# Altium PCB Arduino_to_G2LaunchPad.PcbDoc
Units mil, origin at the board's own origin, x right, y up, seen from the top; angles counter-clockwise.
Board outline 2000 x 1750 mil, 2 copper layers (Top Layer, Bottom Layer); 4 components, 27 nets, 70 pads, 0 vias.
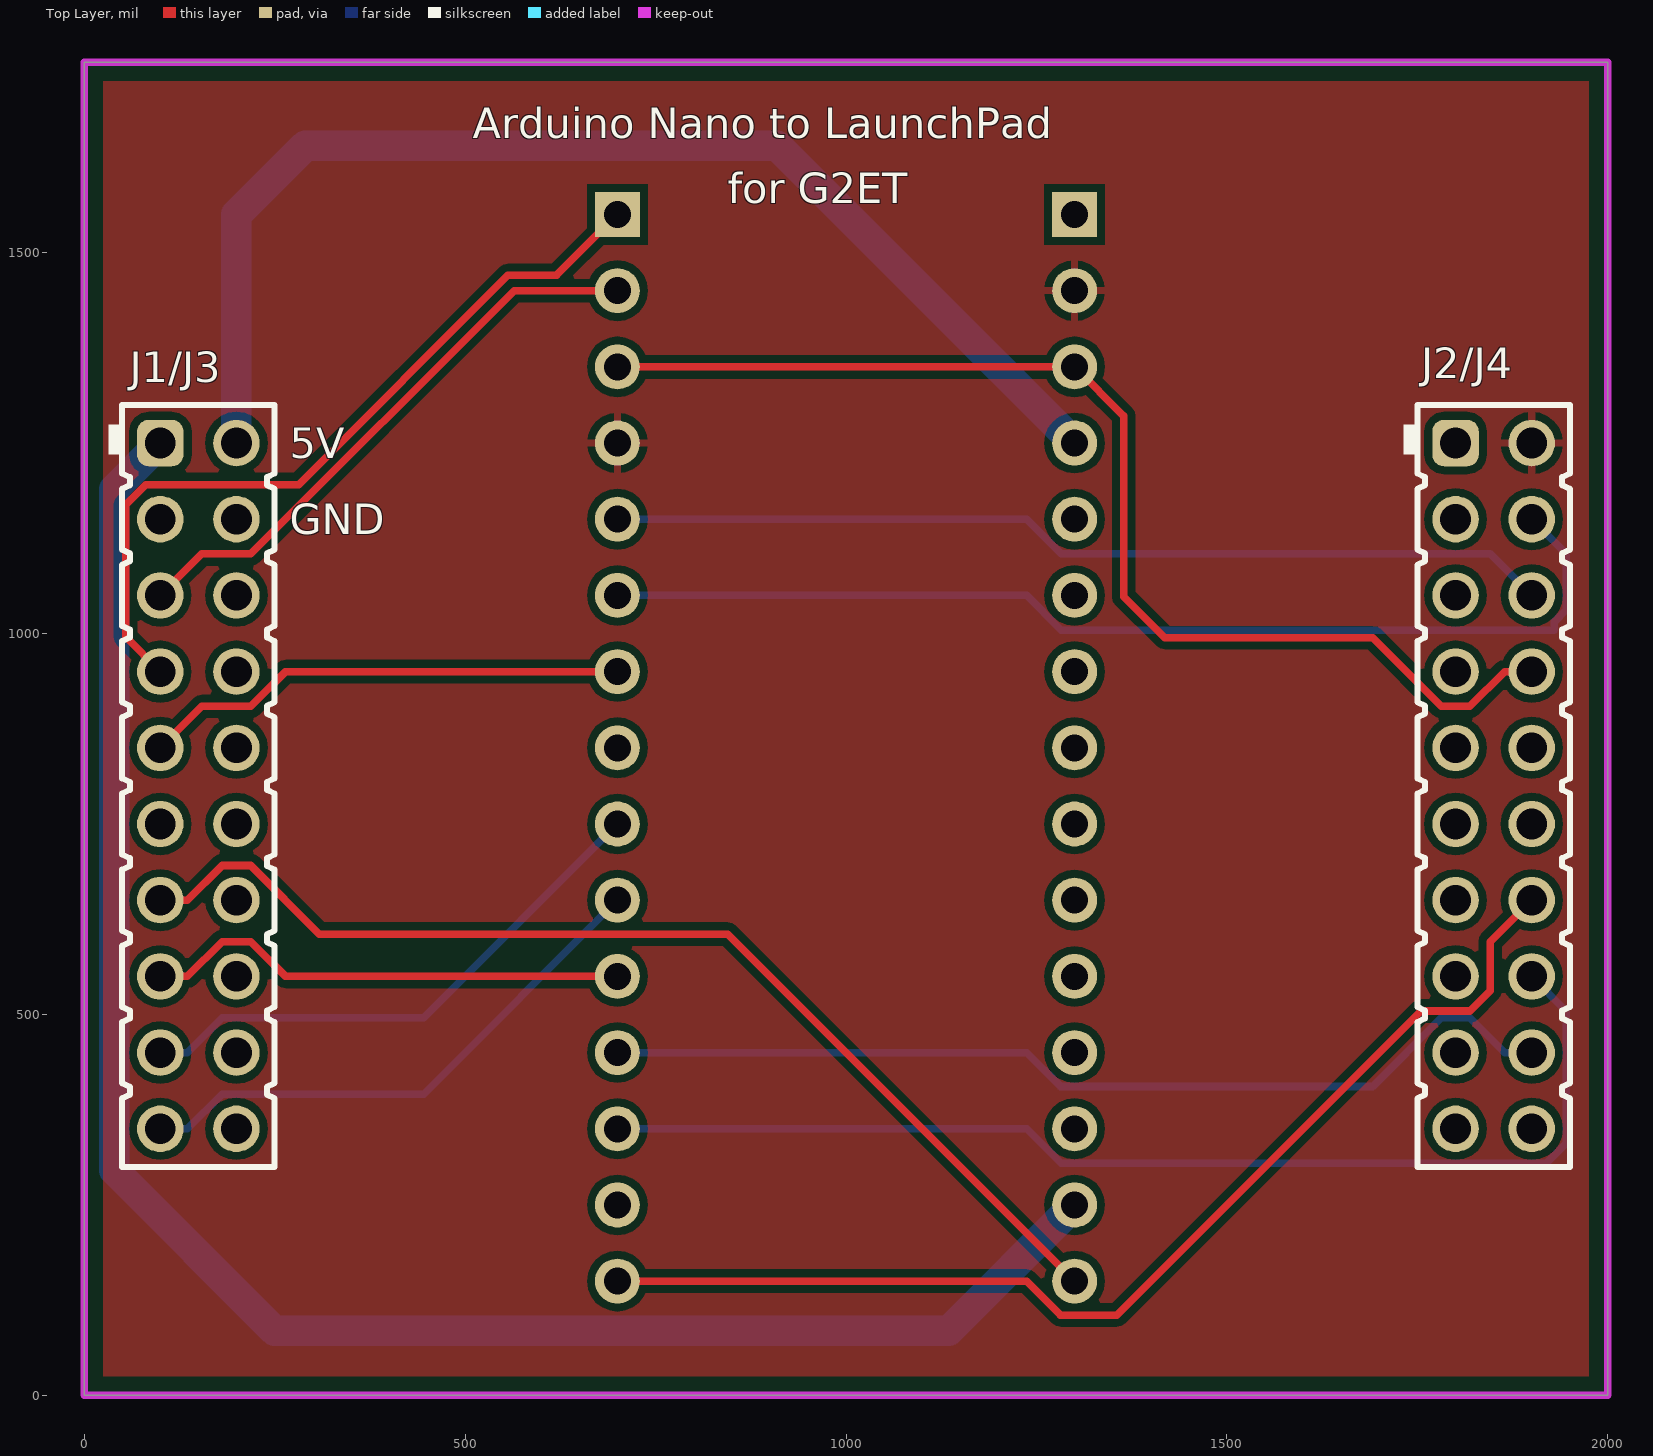
[diagram p0: Top Layer view]
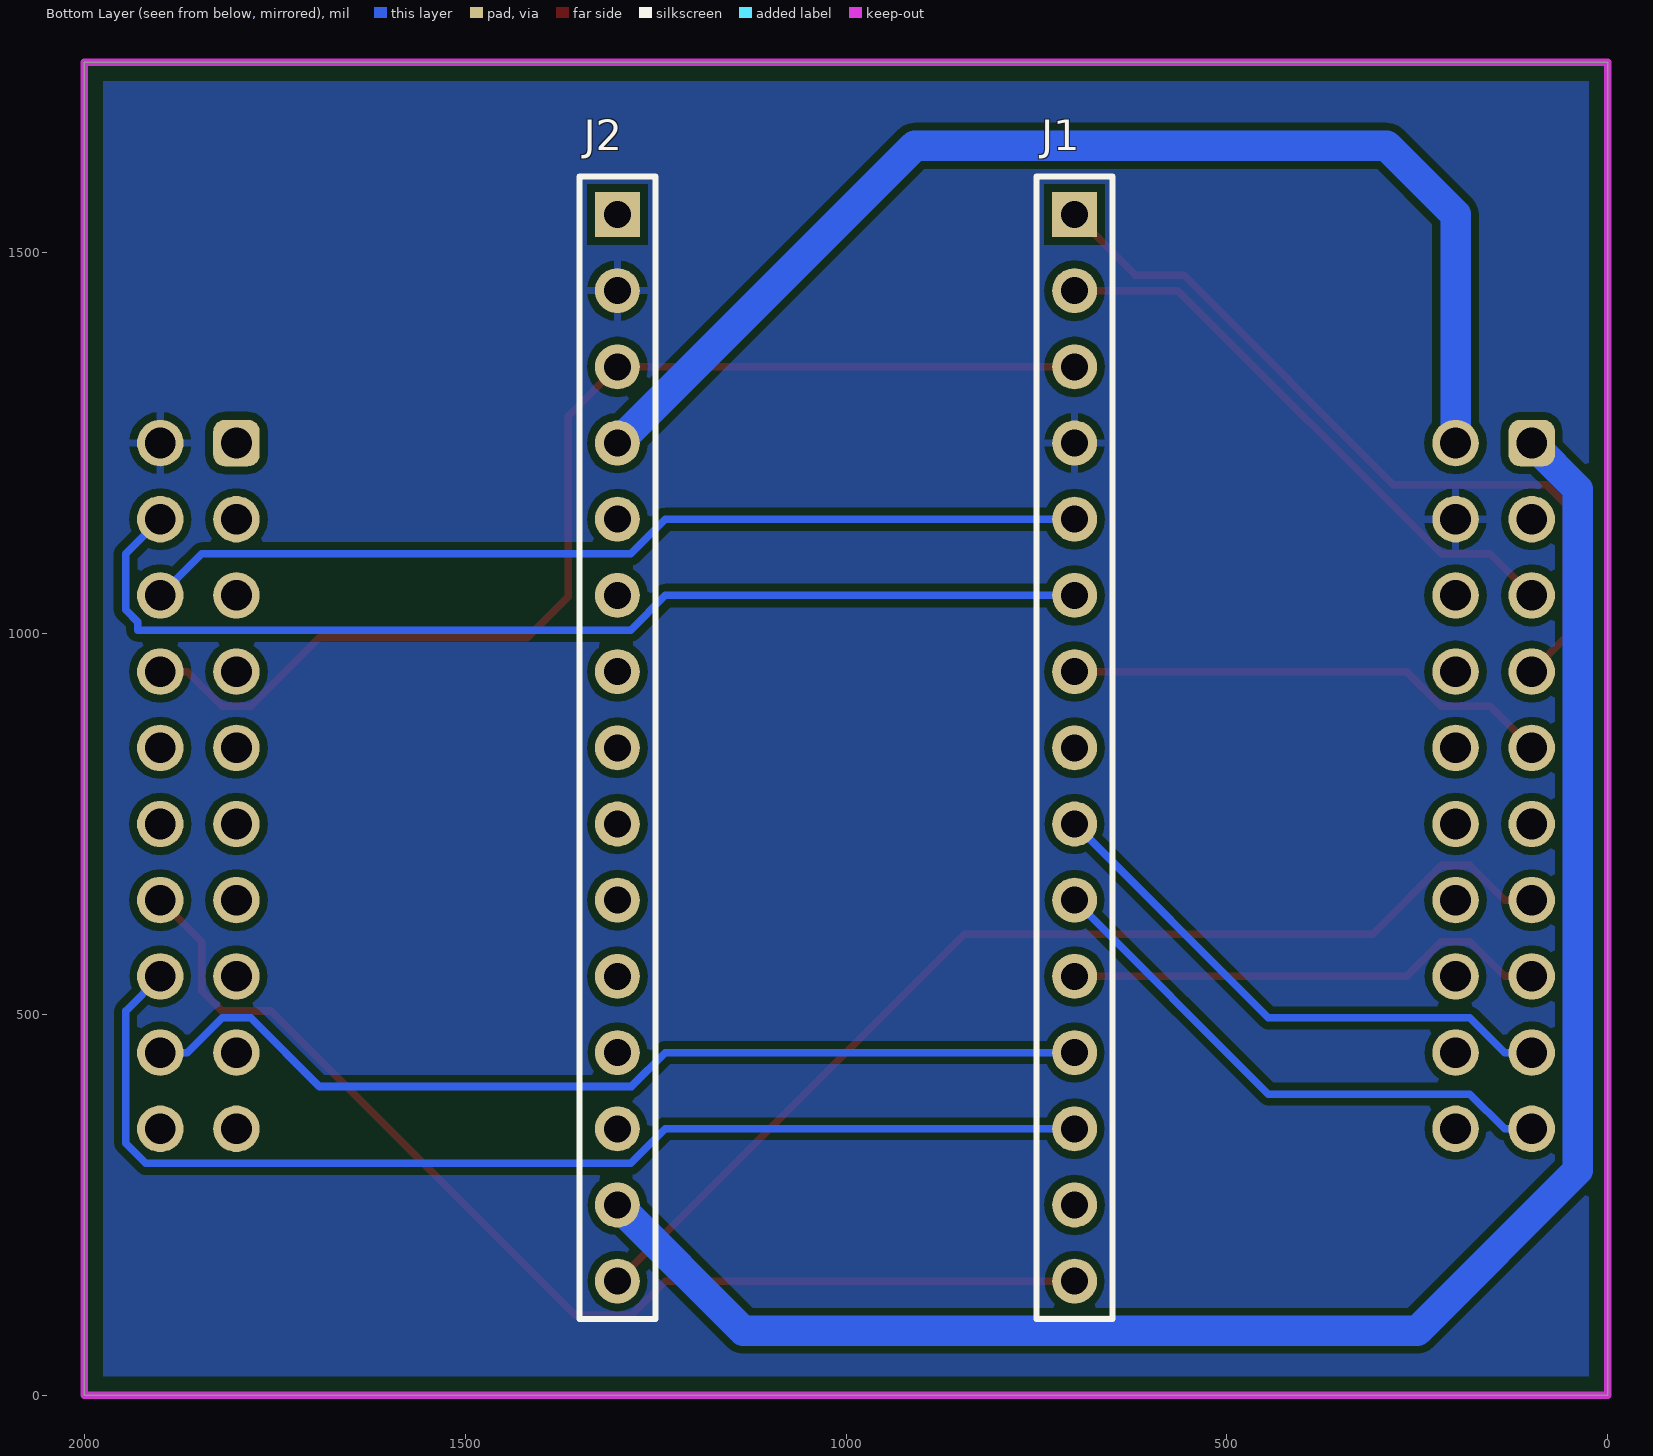
[diagram p1: Bottom Layer view, seen from below]

## Layer stack, top to bottom
Top Solder: solder mask 0.4, Solder Resist, Dk 3.5
Top Layer: signal copper 1.4
Dielectric 1: dielectric 12.6, FR-4, Dk 4.8
Bottom Layer: signal copper 1.4
Bottom Solder: solder mask 0.4, Solder Resist, Dk 3.5

## Board outline
0,0 0,1750 2000,1750 2000,0

## Design rules (kind name [scope] priority, off if disabled: settings)
Clearance [All] p1: gap=10
HoleSize [All] p1: absolutevalues=TRUE maxlimit=100 minlimit=10 maxpercent=80.000 minpercent=20.000
PolygonConnect [All] p1: connectstyle=Relief reliefconductorwidth=10 reliefentries=4 polygonreliefangle="90 Angle" airgapwidth=10
RoutingVias [All] p1: holewidth=28 width=50 viastyle="Through Hole" minholewidth=28 minwidth=50 maxholewidth=28 maxwidth=50
SolderMaskExpansion [All] p1: expansion=4
Width [All] p1: maxlimit=40 minlimit=10 preferedwidth=10 minimp=50.000000 maximp=50.000000 favimp=50.000000
29 further rules are at their usual default settings.

## Components (designator, comment, footprint, x,y, rotation, side; value= is the part's Value field where it differs from the comment)
J1 "Header 15" HDR1X15 700,1550 r270 bottom
J1/J3 "TSW-110-22-G-D" Samtec_TSW-110-22-x-D 150.01,800 r0 top
J2 "Header 15" HDR1X15 1300,1550 r270 bottom
J2/J4 "TSW-110-22-G-D" Samtec_TSW-110-22-x-D 1850.01,800 r0 top

## Footprints (in the part's own frame and the unit in brackets; to place one, negate y for a bottom-side part, rotate by r counter-clockwise, add the part's x,y. Pads: shape width x height; smd on the part's side, far side on the other; paste and mask are expansions set on the pad)
HDR1X15 [mm] "Connector; Header; 15 Position"
  rect 1.5x1.5 hole 0.9: 1(0,0)
  round 1.5 hole 0.9: 2(2.54,0) 3(5.08,0) 4(7.62,0) 5(10.16,0) 6(12.7,0) 7(15.24,0) 8(17.78,0) 9(20.32,0) 10(22.86,0) 11(25.4,0) 12(27.94,0) 13(30.48,0) 14(33.02,0) 15(35.56,0)
  silkscreen extent -1.27,-1.27 36.83,1.27
Samtec_TSW-110-22-x-D [mm] "Header, 2.54mm, 10x2, TH"
  rrect50% 1.55x1.55 hole 1.02: 1(-1.27,11.43)
  round 1.55 hole 1.02: 2(1.27,11.43) 3(-1.27,8.89) 4(1.27,8.89) 5(-1.27,6.35) 6(1.27,6.35) 7(-1.27,3.81) 8(1.27,3.81) 9(-1.27,1.27) 10(1.27,1.27) 11(-1.27,-1.27) 12(1.27,-1.27) 13(-1.27,-3.81) 14(1.27,-3.81) 15(-1.27,-6.35) 16(1.27,-6.35) 17(-1.27,-8.89) 18(1.27,-8.89) 19(-1.27,-11.43) 20(1.27,-11.43)
  silkscreen extent -3,-12.7 2.54,12.7, body extent -2.54,-12.7 2.54,12.7, height 8.38

## Part data
J1 J2: "Header, 15-Pin"
J1/J3 J2/J4: "Header, 2.54mm, 10x2, Gold, TH"

## Nets (pads, with @x,y where several pads share a name; then routed paths per layer and width w, separated by ;. In a path a pad name is that pad's centre, name@x,y a point inside that pad or via, vN(x,y) a via of type N, cw(c..) or ccw(c..) an arc to the next point about the centre after c; other vN are vias at no path point)
3V3: J1/J3.1 J2.14 | length 2395.6
  Bottom Layer w40: J1/J3.1 39.49,1189.49 39.49,295.51 250,85 1135,85 J2.14
5V: J1/J3.2 J2.4 | length 1598.8
  Bottom Layer w40: J1/J3.2 200,1550 290,1640 910,1640 J2.4
A0: J2.12
A1: J2.11
A2: J2.10
A3: J2.9
A4: J2.8
A5: J2.7
A6: J2.6
A7: J2.5
AREF: J2.13
D0/RX: J1.2 J1/J3.5 | length 765.7
  Top Layer w10: J1/J3.5 154.49,1104.49 218.85,1104.49 564.36,1450 J1.2
D1/TX: J1.1 J1/J3.7 | length 1041.1
  Top Layer w10: J1/J3.7 54.49,995.51 54.49,1168.85 81.15,1195.51 281.59,1195.51 556.08,1470 620,1470 J1.1
D2: J1.5 J2/J4.6 | length 1241.4
  Bottom Layer w10: J1.5 1237.03,1150 1282.54,1104.49 1845.51,1104.49 J2/J4.6
D3: J1.6 J2/J4.4 | length 1419.3
  Bottom Layer w10: J1.6 1237.03,1050 1282.54,1004.49 1929.49,1004.49 1929.49,1015.12 1945.51,1031.15 1945.51,1104.49 J2/J4.4
D4: J1.7 J1/J3.9 | length 641.4
  Top Layer w10: J1/J3.9 154.49,904.49 218.85,904.49 264.36,950 J1.7
D5: J1.8
D6: J1.9 J1/J3.17 | length 724.3
  Bottom Layer w10: J1/J3.17 135.64,450 181.15,495.51 445.51,495.51 J1.9
D7: J1.10 J1/J3.19 | length 724.3
  Bottom Layer w10: J1/J3.19 135.64,350 181.15,395.51 445.51,395.51 J1.10
D8: J1.11 J1/J3.15 | length 637.7
  Top Layer w10: J1/J3.15 135.64,550 181.15,595.51 218.85,595.51 264.36,550 J1.11
D9: J1.12 J2/J4.18 | length 1274.6
  Bottom Layer w10: J1.12 1237.03,450 1281.56,405.47 1691.11,405.47 1781.15,495.51 1818.85,495.51 1864.36,450 J2/J4.18
D10: J1.13 J2/J4.16 | length 1513.1
  Bottom Layer w10: J1.13 1237.03,350 1282.54,304.49 1918.85,304.49 1945.51,331.15 1945.51,504.49 J2/J4.16
D11/MOSI: J1.14
D12/MISO: J1.15 J2/J4.14 | length 1481.7
  Top Layer w10: J1.15 1237.03,150 1281.56,105.47 1355.47,105.47 1754.49,504.49 1818.85,504.49 1845.51,531.15 1845.51,595.51 J2/J4.14
D13/SCK: J1/J3.13 J2.15 | length 1444.8
  Top Layer w10: J1/J3.13 135.64,650 181.15,695.51 218.85,695.51 308.89,605.47 844.53,605.47 J2.15
GND: J1.4 J1/J3.4 J2.2 J2/J4.2
RESET: J1.3 J2.3 J2/J4.8 | length 1542.2
  Top Layer w10: J1.3 J2.3 1364.53,1285.47 1364.53,1048.44 1418.44,994.53 1691.11,994.53 1781.15,904.49 1818.85,904.49 1864.36,950 J2/J4.8
pads on no net: J1/J3.3 J1/J3.6 J1/J3.8 J1/J3.10 J1/J3.11 J1/J3.12 J1/J3.14 J1/J3.16 J1/J3.18 J1/J3.20 J2.1 J2/J4.1 J2/J4.3 J2/J4.5 J2/J4.7 J2/J4.9 J2/J4.10 J2/J4.11 J2/J4.12 J2/J4.13 J2/J4.15 J2/J4.17 J2/J4.19 J2/J4.20

## Polygon pours and split planes (outlines as drawn)
GND on Top Layer "Bottom Layer-GND" (solid, remove dead copper, pour order 6): 25,25 1975,25 1975,1725 25,1725
GND on Bottom Layer "Bottom Layer-GND" (solid, remove dead copper, pour order 8): 25,25 1975,25 1975,1725 25,1725

## Keep-outs
Keep-Out Layer:
  the board outline again, w10

## Silkscreen, mask and mechanical layers (free items; w line width, h text height)
Top Overlay:
  text "Arduino Nano to LaunchPad" at 510,1650 h40
  text "for G2ET" at 845,1565 h40
  text "5V" at 270,1230 h40
  text "GND" at 270,1130 h40